# EAGLE board Safmet (EAGLE 9.6.2)
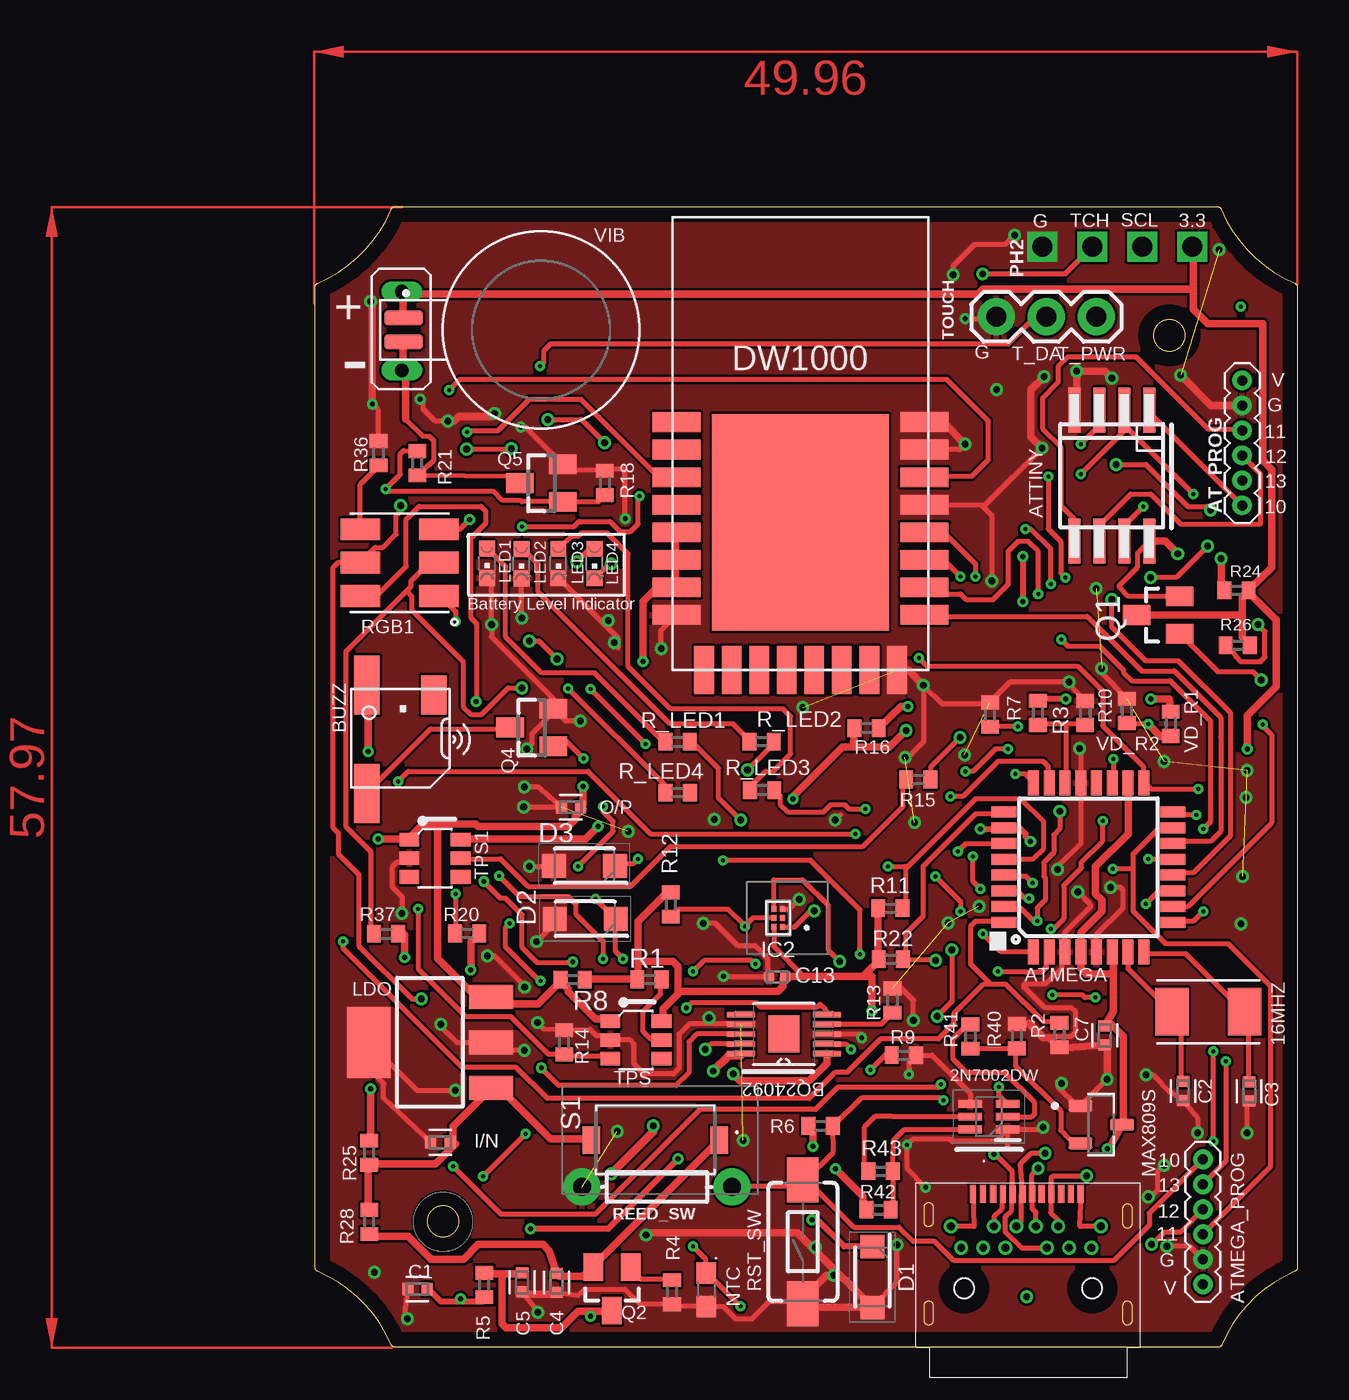
[diagram p0: board, top side]
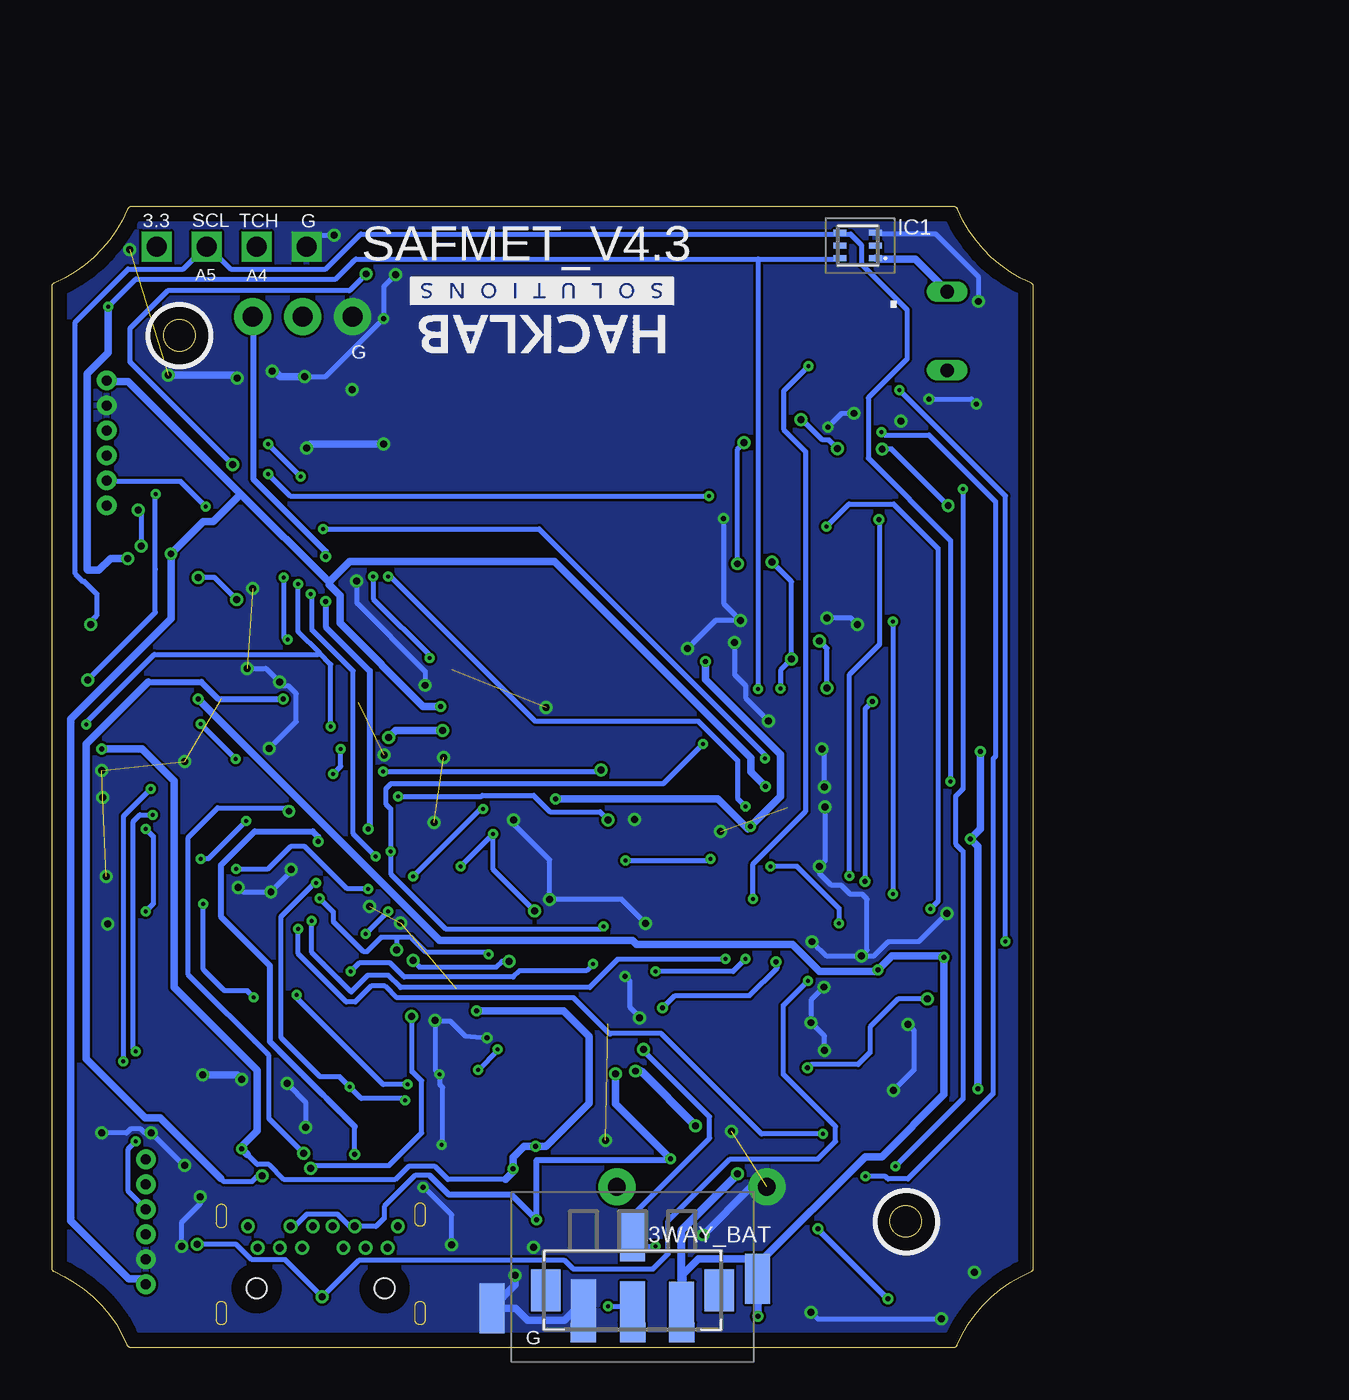
[diagram p1: board, bottom side, seen from below]

Size 49.9 x 57.95 mm. Coordinates in mm from the lower left corner, seen from the top.
Outline: 0,53.89 arc-67 0.12,54.07 arc44 3.85,57.8 arc-67 4.03,57.95 45.87,57.95 arc-67 46.05,57.8 arc44 49.78,54.07 arc-67 49.9,53.89 49.9,4.03 arc-67 49.78,3.85 arc44 46.07,0.12 arc-67 45.89,0 4.05,0 arc-67 3.87,0.12 arc44 0.12,3.85 arc-67 0,4.03 0,53.89
Outline: circle at 43.4,51.42 radius 0.8
Outline: circle at 6.5,6.4 radius 0.8
Copper layers (1*16): Top 0.035mm / dielectric 1.5mm / Bottom 0.035mm
Design rules "default *": minimum track width 10mil, minimum drill 8mil, track to track 5mil, track to pad 5mil, pad to pad 5mil, via to via 5mil, smd to smd 5mil, copper to edge 30mil, drill to drill 6mil, minimum pad ring 5mil, minimum via ring 6mil, stop-mask expansion 4mil, vias tented up to drill 20mil, thermal gap 0mil
Holes 1.02 mm at 32.98,3 39.48,3

## Footprints (pad centres in the part's own frame; a part is rotated, then mirrored left to right if it is on the bottom)
SOT65P210X110-6N = smd 1.2 x 0.4: 1 -0.95,0.65; 2 -0.95,0; 3 -0.95,-0.65; 4 0.95,-0.65; 5 0.95,0; 6 0.95,0.65
009155003541006 = smd 1.3 x 1: 1 -2.5,3.075; 2 0,3.075; 3 2.5,3.075 | smd 1.5 x 2.15: 4 -4.4,0.925; 5 4.4,0.925
CRYSTAL-TXC-7A = smd 1.7 x 2.4: P$1 1.85,0; P$2 -1.85,0
1X06_1.27MM = drill 0.508 pad 1: 1 0,0; 2 1.27,0; 3 2.54,0; 4 3.81,0; 5 5.08,0; 6 6.35,0
TQFP32-08 = smd 1.27 x 0.559: 1 -4.293,2.8; 2 -4.293,2; 3 -4.293,1.2; 4 -4.293,0.4; 5 -4.293,-0.4; 6 -4.293,-1.2; 7 -4.293,-2; 8 -4.293,-2.8; 17 4.293,-2.8; 18 4.293,-2; 19 4.293,-1.2; 20 4.293,-0.4; 21 4.293,0.4; 22 4.293,1.2; 23 4.293,2; 24 4.293,2.8 | smd 0.559 x 1.27: 9 -2.8,-4.293; 10 -2,-4.293; 11 -1.2,-4.293; 12 -0.4,-4.293; 13 0.4,-4.293; 14 1.2,-4.293; 15 2,-4.293; 16 2.8,-4.293; 25 2.8,4.293; 26 2,4.293; 27 1.2,4.293; 28 0.4,4.293; 29 -0.4,4.293; 30 -1.2,4.293; 31 -2,4.293; 32 -2.8,4.293
ATTINY85 = smd 0.6 x 2.286: 1 -1.905,-3.33; 2 -0.635,-3.33; 3 0.635,-3.33; 4 1.905,-3.33; 5 1.905,3.33; 6 0.635,3.33; 7 -0.635,3.33; 8 -1.905,3.33
SOP50P490X110-11N = smd 1.422 x 0.279: 1 -2.184,0.991; 2 -2.184,0.508; 3 -2.184,0; 4 -2.184,-0.508; 5 -2.184,-0.991; 6 2.184,-0.991; 7 2.184,-0.508; 8 2.184,0; 9 2.184,0.508; 10 2.184,0.991 | smd 1.575 x 1.88: 11 0,0
SMT-0540-S-R = smd 1.3 x 3: + 1.7,-2.7; - 1.7,2.8 | smd 1.3 x 2: M -1.7,-2.2
CAPC1005X60 = smd 0.56 x 0.629: 1 -0.485,0; 2 0.485,0
CAPC1005X55N = smd 0.54 x 0.6: 1 -0.43,0; 2 0.43,0
SODFL3618X108N = smd 1.2 x 1.22: 1 -1.55,0; 2 1.55,0
DWM1000 = smd 2.45 x 1: EXTON -2.8,12.6; GPIO7 -2.8,8.4; IRQ/GPIO8 9.8,9.8; RST -2.8,9.8; SPICLK 9.8,7; SPICSN 9.8,2.8; SPIMISO 9.8,5.6; SPIMOSI 9.8,4.2; VDD3V3 -2.8,4.2; VDD3V3.2 -2.8,5.6; VDDAON -2.8,7; VSS -2.8,2.8; VSS.2 9.8,12.6; VSS.3 9.8,11.2; VSS.4 9.8,8.4; WAKEUP -2.8,11.2 | smd 9 x 11: GND 3.5,7.5 | smd 1 x 2.45: GPIO0 7,0; GPIO1 5.6,0; GPIO2 4.2,0; GPIO3 2.8,0; GPIO4 1.4,0; GPIO5 0,0; GPIO6 -1.4,0; VSS.5 8.4,0
LTR303ALS01 = smd 0.3 x 0.65: 1 -0.65,-0.9; 2 0,-0.9; 3 0.65,-0.9; 4 0.65,0.9; 5 0,0.9; 6 -0.65,0.9
MXC4005XC = smd 0.25 x 0.3: 1 -0.22,0.46; 2 -0.22,0; 3 -0.22,-0.46; 4 0.22,-0.46; 5 0.22,0; 6 0.22,0.46
SOT223 = smd 1.219 x 2.235: 1 -2.311,-3.099; 2 0,-3.099; 3 2.311,-3.099 | smd 3.6 x 2.2: 4 0,3.099
CHIPLED_0603 = smd 0.8 x 0.8: A 0,-0.75; C 0,0.75
SOT95P237X111-3N = smd 1.23 x 0.6: 1 -1.06,0.95; 2 -1.06,-0.95; 3 1.06,0
THERM_NCP18WF104J03RB = smd 1.1 x 1: 1 -0.85,0; 2 0.85,0
SMD1,27-2,54 = smd 1.27 x 2.54: 1 0,0
PH010-1-4 = drill 1.016 square: 1 0,0; 2 2.54,0; 3 5.08,0; 4 7.62,0
SUPER-SOT3 = smd 1 x 1.4: 1 -0.95,-1.1; 2 0.95,-1.1; 3 0,1.1
SOT23 = smd 1 x 1.4: 1 -0.95,-1.1; 2 0.95,-1.1; 3 0,1.1
R0402 = smd 0.7 x 0.9: 1 -0.61,0; 2 0.622,0
AXIAL-0.3 = drill 0.9 pad 1.88: P$1 -3.81,0; P$2 3.81,0
RGBLED5050 = smd 2 x 1.1: 1 -2,1.7; 2 -2,0; 3 -2,-1.7; 4 2,-1.7; 5 2,0; 6 2,1.7
TACTILE_SWITCH_SMD_6.0X3.5MM = smd 2.3 x 1.6: 1 -3.15,0; 2 3.15,0
PTS636SK50JSMTRLFS = smd 0.9 x 1.4: 1 -3.25,0; 2 3.25,0
1X03 = drill 1.016 pad 1.88: 1 0,0; 2 2.54,0; 3 5.08,0
SOT-23-6 = smd 0.69 x 1: CT 0.95,1.3; GND 0,-1.3; ON 0.95,-1.3; QOD 0,1.3; VIN -0.95,-1.3; VOUT -0.95,1.3
PHLS005-1-2 = drill 0.7 pad 1.016 long: 1 -2,0; 2 2,0
CUI_USB-31C-F-24X7F = smd 0.32 x 0.91: A1 -3.25,4.48; A2 -2.742,4.479; A3 -2.23,4.48; A4 -1.73,4.48; A5 -1.23,4.48; A6 -0.73,4.48; A7 -0.248,4.489; A8 0.24,4.483; A9 0.735,4.474; A10 1.235,4.477; A11 1.728,4.483; A12 2.222,4.486 | drill 0.4 pad 0.7: B1 3.25,2.82; B2 2.76,1.73; B3 1.63,1.73; B4 1.08,2.82; B5 0.5,1.73; B6 -0.05,2.82; B7 -1.05,2.82; B8 -1.6,1.73; B9 -2.18,2.82; B10 -2.73,1.73; B11 -3.85,1.73; B12 -4.37,2.82
XDCR_C0720B001F = smd 0.76 x 1.94: 1 -0.6,-5.02; 2 0.6,-5.02

## Placement (x,y rotation side)
2N7002DW  2N7002DW  [SOT65P210X110-6N]  34.23,11.72 180 top
3WAY_BAT  009155003541006  [009155003541006]  20.38,3.82 180 bottom
16MHZ  16MHz  [CRYSTAL-TXC-7A]  45.38,17.05 180 top
AT_PROG  [1X06_1.27MM]  47.1,42.78 90 top
ATMEGA  ATMEGA328P_TQFP  [TQFP32-08]  39.3,24.39 90 top
ATMEGA_PROG  [1X06_1.27MM]  45.11,9.55 270 top
ATTINY  ATTINY85SU  [ATTINY85]  40.48,44.29 180 top
BQ24092  BQ24092DGQR  [SOP50P490X110-11N]  23.81,15.91 180 top
BUZZ  SMT-0540-S-R  [SMT-0540-S-R]  4.33,30.94 180 top
C1  1uF  [CAPC1005X60]  5.2,2.96 180 top
C2  18pF  [CAPC1005X60]  44.1,13.02 270 top
C3  18pF  [CAPC1005X60]  47.46,13 270 top
C4  4.7uF  [CAPC1005X60]  12.26,3.28 90 top
C5  1uF  [CAPC1005X60]  10.52,3.3 270 top
C7  1uF  [CAPC1005X60]  40.12,15.85 270 top
C13  1~4.7uF  [CAPC1005X55N]  23.48,18.83 180 top
D1  SMF5.0CA  [SODFL3618X108N]  28.31,3.57 270 top
D2  SMF5.0CA  [SODFL3618X108N]  13.68,24.46 180 top
D3  SMF5.0CA  [SODFL3618X108N]  13.72,21.77 180 top
DECAWAVE  DWM1000  [DWM1000]  21.16,34.41 0 top
I/N  1uF  [CAPC1005X60]  6.36,10.42 180 top
IC1  LTR-308ALS-01  [LTR303ALS01]  8.93,55.99 90 bottom
IC2  MXC4005XC  [MXC4005XC]  23.53,21.82 180 top
LDO  TC1264  [SOT223]  5.83,15.5 90 top
LED1  [CHIPLED_0603]  8.73,39.84 180 top
LED2  [CHIPLED_0603]  10.49,39.81 180 top
LED3  [CHIPLED_0603]  12.36,39.83 180 top
LED4  [CHIPLED_0603]  14.19,39.83 180 top
MAX809S  MAX809SN293D3T1G  [SOT95P237X111-3N]  39.94,11.32 0 top
NTC  NCP18WF104J03RB  [THERM_NCP18WF104J03RB]  19.87,2.92 270 top
O/P  1uF 10V  [CAPC1005X60]  13,27.44 180 top
PAD1  [SMD1,27-2,54]  17.89,2.05 180 bottom
PAD2  [SMD1,27-2,54]  22.88,2.18 180 bottom
PAD3  [SMD1,27-2,54]  20.38,2.07 180 bottom
PAD4  [SMD1,27-2,54]  14.03,3.49 180 bottom
PAD5  [SMD1,27-2,54]  27.52,1.99 180 bottom
PAD6  [SMD1,27-2,54]  20.37,5.65 180 bottom
PH2  PH1X4-10  [PH010-1-4]  36.95,55.93 0 top
Q1  FDN360P  [SUPER-SOT3]  42.83,37.21 90 top
Q2  FDN360P  [SUPER-SOT3]  15.08,2.98 180 top
Q4  SI2302  [SOT23]  11,31.49 90 top
Q5  SI2302  [SOT23]  11.49,43.91 90 top
R1  1k  [R0402]  16.99,18.7 180 top
R2  10K  [R0402]  37.81,15.87 270 top
R3  1K  [R0402]  36.73,32.23 90 top
R4  10k  [R0402]  18.13,2.81 270 top
R5  0  [R0402]  8.6,3.18 270 top
R6  10K  [R0402]  25.68,11.25 0 top
R7  10K  [R0402]  34.29,32.14 90 top
R8  0 ohms  [R0402]  13.09,18.68 180 top
R9  540  [R0402]  29.91,14.84 0 top
R10  2K  [R0402]  39.13,32.24 270 top
R11  2.7K  [R0402]  29.24,22.31 180 top
R12  2.7K  [R0402]  18.07,22.49 90 top
R13  4.7k  [R0402]  29.33,17.62 270 top
R14  1k  [R0402]  12.65,15.51 270 top
R15  1k  [R0402]  30.64,28.85 0 top
R16  0 ohms  [R0402]  28.01,31.46 0 top
R18  10K  [R0402]  14.72,43.93 270 top
R20  1.5k  [R0402]  7.72,21.03 0 top
R21  0  [R0402]  5.19,44.92 90 top
R22  2.7K  [R0402]  29.26,19.72 180 top
R24  10K  [R0402]  46.8,38.47 0 top
R25  0ohm  [R0402]  2.75,9.88 90 top
R26  10K  [R0402]  46.88,35.67 0 top
R28  0  [R0402]  2.75,6.36 90 top
R36  220  [R0402]  3.22,45.44 270 top
R37  1.5K  [R0402]  3.6,21.01 0 top
R40  100k(1%)  [R0402]  35.65,15.82 270 top
R41  1k(1%)  [R0402]  33.3,15.8 270 top
R42  10K(1%)  [R0402]  28.62,6.99 0 top
R43  1k(1%)  [R0402]  28.74,8.95 180 top
R_LED1  220  [R0402]  18.41,30.76 0 top
R_LED2  220  [R0402]  22.68,30.77 0 top
R_LED3  220  [R0402]  22.7,28.31 0 top
R_LED4  220  [R0402]  18.42,28.18 0 top
REED_SW  0  [AXIAL-0.3]  17.37,8.15 0 top
RGB1  RGBLED5050  [RGBLED5050]  4.29,39.87 180 top
RST_SW  MOMENTARY-SWITCH-SPST-SMD-6.0X3.5MM  [TACTILE_SWITCH_SMD_6.0X3.5MM]  24.78,5.36 90 top
S1  PTS636_SK50J_SMTR_LFS  [PTS636SK50JSMTRLFS]  17.28,10.53 180 top
TOUCH  455-1750-1-ND  [1X03]  34.61,52.37 0 top
TPS  TPS22918  [SOT-23-6]  16.3,15.61 270 top
TPS1  TPS22918  [SOT-23-6]  6.09,24.85 270 top
U$1  2MM  [PHLS005-1-2]  4.4,51.65 90 top
U$2  3A_5V  [CUI_USB-31C-F-24X7F]  36.68,3.32 0 top
VD_R1  12K  [R0402]  43.47,31.69 270 top
VD_R2  3.9K  [R0402]  41.25,32.33 90 top
VIB  C0720B001F  [XDCR_C0720B001F]  9.51,51.7 270 top

## Library data of the parts
2N7002DW = 2N7002DW; DESCRIPTION: 2N7002DW, Dual N-channel MOSFET Transistor, 0.115A 60V, 6-Pin SC-70; HEIGHT: 1.1mm; MANUFACTURER_NAME: ON Semiconductor; MANUFACTURER_PART_NUMBER: 2N7002DW; MOUSER_PART_NUMBER: 512-2N7002DW; MOUSER_PRICE-STOCK: https://www.mouser.co.uk/ProductDetail/ON-Semiconductor/2N7002DW?qs=4aVxpR%2FL9VItb3yGt5CeZg%3D%3D
3WAY_BAT = 009155003541006; DESCRIPTION: Battery Contacts 3 Way .4um Gold RT Angle 2.5mm; HEIGHT: 4mm; MANUFACTURER_NAME: AVX; MANUFACTURER_PART_NUMBER: 009155003541006; MOUSER_PART_NUMBER: 581-009155003541006; MOUSER_PRICE-STOCK: https://www.mouser.com/Search/Refine.aspx?Keyword=581-009155003541006
16MHZ = SparkFun-FreqCtrl
AT_PROG ATMEGA_PROG = SparkFun-Connectors
ATMEGA = SparkFun-DigitalIC; PROD_ID: IC-09069
ATTINY = attiny85
BQ24092 = BQ24092DGQR; AVAILABILITY: Unavailable; DESCRIPTION: 1A, Single-Input, Single-Cell Li-Ion Battery Charger with Operation Over JEITA and 10kO NTC 10-MSOP-PowerPAD -40 to 150; MF: Texas Instruments; MP: BQ24092DGQR; PACKAGE: MSOP-10 Texas Instruments; PRICE: None
BUZZ LED1-LED4 RGB1 = adafruit
C1-C5 C7 I/N O/P = Capacitor; CATEGORY: Capacitor
C13 = C0402C201GAGACTU; AVAILABILITY: Unavailable; DESCRIPTION: Multilayer Ceramic Capacitors MLCC - SMD/SMT 250V 200pF C0G 0402 0.02; MF: KEMET; MP: C0402C201GAGACTU; PACKAGE: 0402 KEMET; PRICE: None
D1-D3 = SMF5.0CA; DESCRIPTION: ESD Suppressors / TVS Diodes "TVS SMF 5.0V BI, 7'' TR" Surface Mount 200W > SMF Series; HEIGHT: 1.08mm; MANUFACTURER_NAME: LITTELFUSE; MANUFACTURER_PART_NUMBER: SMF5.0CA; MOUSER_PART_NUMBER: 576-SMF5.0CA; MOUSER_PRICE-STOCK: https://www.mouser.co.uk/ProductDetail/Littelfuse/SMF50CA?qs=d0WKAl%252BL4KbRT8gYdmqI%252Bg%3D%3D
DECAWAVE = DWM1000
IC1 = LTR-308ALS-01; DESCRIPTION: Ambient Light Sensors Ambient Light Photo Sensor; HEIGHT: 0mm; MANUFACTURER_NAME: Lite-On; MANUFACTURER_PART_NUMBER: LTR-308ALS-01; MOUSER_PART_NUMBER: N/A; MOUSER_PRICE-STOCK: https://www.mouser.com/Search/Refine.aspx?Keyword=N%2FA
IC2 = MXC4005XC_ACC; DESCRIPTION: Accelerometers Monolithic and Wafer Level Packaged Three-Axis Accelerometer; HEIGHT: 0.885mm; MANUFACTURER_NAME: MEMSIC; MANUFACTURER_PART_NUMBER: MXC4005XC; MOUSER_PART_NUMBER: 438-MXC4005XC; MOUSER_PRICE-STOCK: https://www.mouser.co.uk/ProductDetail/MEMSIC/MXC4005XC?qs=RcG8xmE7yp3iyYgWLmAtUw%3D%3D
LDO = tc1264
MAX809S = MAX809SN293D3T1G; AVAILABILITY: Warning; DESCRIPTION: Supervisor Push-Pull, Totem Pole 1 Channel SOT-23-3 (TO-236); MF: ON Semiconductor; MP: MAX809SN293D3T1G; PACKAGE: SOT-23-3 ON Semiconductor; PRICE: None; PURCHASE-URL: https://pricing.snapeda.com/search/part/MAX809SN293D3T1G/?ref=eda
NTC = NCP18WF104J03RB; AVAILABILITY: Unavailable; DESCRIPTION: NTC Thermistor 100k 0603 _1608 Metric_; MF: Murata Electronics; MP: NCP18WF104J03RB; PACKAGE: 0603 Murata Electronics; PRICE: None
PAD1-PAD6 = wirepad
PH2 = pel_hdr
Q1 Q2 = FDN360P; ARROW_ELECTRONICS-PURCHASE-URL: https://snapeda.com/shop?store=Arrow+Electronics&id=2105995; AVAILABILITY: Good; DESCRIPTION: P-Channel 30V 2A (Ta) 500mW (Ta) Surface Mount SuperSOT-3; DIGIKEY-PURCHASE-URL: https://snapeda.com/shop?store=DigiKey&id=2105995; MF: ON Semiconductor; MOUSER-PURCHASE-URL: https://snapeda.com/shop?store=Mouser&id=2105995; MP: FDN360P; PACKAGE: SC-59 ON Semiconductor; PRICE: None
Q4 Q5 = SI2302; AVAILABILITY: Bad; DESCRIPTION: N-Channel 20V 2.6A (Ta) 710mW (Ta) Surface Mount SOT-23-3 (TO-236); MF: Vishay Siliconix; MP: SI2302; PACKAGE: SOT-23-3 Vishay Siliconix; PRICE: None
R1-R16 R18 R20-R22 R24-R26 R28 R36 R37 R40-R43 R_LED1-R_LED4 VD_R1 VD_R2 = resistor2
REED_SW = Hacklab_Resistors; PART_NO: 0_OHM_AXIAL-0.3_1/4W_5%; PINS: 2; SKU: RES_0_OHM_AXIAL-0.3 _1/4W_5%; TYPE: TH
RST_SW = SparkFun-Switches; PROD_ID: SWCH-00815; SF_SKU: COM-08229
S1 = 6x3.5mm_5mm_H switch; DESCRIPTION: Tactile Switches Tact 50mA 12VDC, 6.0x3.5, 5.0mm H, 250gf, J leads, No ground pin, Red Actuator; HEIGHT: 5mm; MANUFACTURER_NAME: C & K COMPONENTS; MANUFACTURER_PART_NUMBER: PTS636 SK50J SMTR LFS; MOUSER_PART_NUMBER: 611-PTS636SK50JSMTRL; MOUSER_PRICE-STOCK: https://www.mouser.co.uk/ProductDetail/CK/PTS636-SK50J-SMTR-LFS?qs=vLWxofP3U2y%2F9cEgatLecw%3D%3D
TOUCH = Hacklab_Connectors; PROD_ID: XXX-00000
TPS TPS1 = tps22918
U$1 = 2MM
U$2 = Hack_USB-31C-F-24x7F; MFR: XIAMEN; PART_NO: USB-31C-F-24x7F; PINS: 24; SKU: USB-31C-F-24x7F; TYPE: SMD
VIB = C0720B001F; AVAILABILITY: Warning; DESCRIPTION: DC Motor Vibration, ERM 10000 RPM 3VDC; DIGIKEY-PURCHASE-URL: https://snapeda.com/shop?store=DigiKey&id=645169; MF: Jinlong Machinery; MP: C0720B001F; PACKAGE: Jinlong Machinery; PRICE: None

## Nets
3V3: ATMEGA.4 ATMEGA.6 ATMEGA.18 C7.1 C13.1 IC1.1 IC2.6 MAX809S.3 PH2.4 Q1.3 R1.2 R6.1 R8.1 R11.2 R12.2 R22.2 R24.2 R26.2 R42.1 TPS.VOUT U$1.2 VIB.1
ADC7: ATMEGA.22 R3.1 R10.2
BUZZ: ATMEGA.10 Q4.1 R7.1
BUZZ-: BUZZ.- Q4.3
CH_S: BQ24092.8 LED4.C RGB1.5
DW_3V3: DECAWAVE.VDD3V3 DECAWAVE.VDD3V3.2 DECAWAVE.VDDAON R15.2 R16.1 TPS1.VOUT
DW_RST: ATMEGA.13 DECAWAVE.RST
GND: 2N7002DW.1 2N7002DW.4 3WAY_BAT.3 AT_PROG.5 ATMEGA.3 ATMEGA.5 ATMEGA.21 ATMEGA_PROG.5 ATTINY.4 BQ24092.3 BQ24092.7 C1.2 C2.2 C3.2 C4.1 C5.2 C7.2 C13.2 D1.2 D2.2 D3.2 DECAWAVE.VSS DECAWAVE.VSS.2 DECAWAVE.VSS.3 DECAWAVE.VSS.4 DECAWAVE.VSS.5 I/N.2 IC1.3 IC2.3 LDO.2 LDO.4 LED1.C LED2.C LED3.C MAX809S.1 NTC.2 O/P.2 PAD2.1 PAD5.1 PH2.1 Q4.2 Q5.2 R2.2 R4.2 R7.2 R9.2 R10.1 R13.1 R14.1 R18.1 R36.1 R40.1 REED_SW.P$1 RST_SW.1 TOUCH.1 TPS1.GND TPS.GND VD_R2.2
GPIO: ATMEGA.9 ATTINY.3
IMP_RST: MAX809S.2 R40.2 R41.2
IND: ATMEGA.2 RGB1.3
INT: ATMEGA.32 DECAWAVE.IRQ/GPIO8 R2.1
INT1: ATMEGA.25 IC2.4 R22.1
LED_IND1: ATMEGA.23 R_LED1.2
LED_IND2: ATMEGA.24 R_LED2.2
LED_IND3: ATMEGA.1 R_LED3.2
LS_EN: ATTINY.2 Q1.1 R14.2 TPS.ON
MISO: ATMEGA.16 ATMEGA_PROG.3 DECAWAVE.SPIMISO
MOSI: ATMEGA.15 ATMEGA_PROG.4 DECAWAVE.SPIMOSI
N$1: R_LED4.2
N$2: 16MHZ.P$2 ATMEGA.8 C3.1
N$3: 16MHZ.P$1 ATMEGA.7 C2.1
N$4: 2N7002DW.2 R41.1
N$5: R1.1 TPS.QOD
N$6: Q2.1 R4.1
N$7: LED1.A R_LED1.1
N$8: LED2.A R_LED2.1
N$9: I/N.1 LDO.1 R25.1 R28.2 S1.2
N$10: BQ24092.2 R9.1
N$11: BQ24092.4 R13.2
N$12: ATMEGA.19 VD_R1.2 VD_R2.1
N$13: R36.2 RGB1.4
N$14: R20.1 RGB1.1
N$15: LED4.A R37.1 R_LED4.1 RGB1.2
N$16: R15.1 TPS1.QOD
N$17: LED3.A R_LED3.1
N$18: U$2.A1 U$2.B12
N$19: U$2.A12 U$2.B1
N$23: 2N7002DW.6 R42.2 R43.1
N$24: 2N7002DW.5 R43.2
PB0: AT_PROG.4 ATTINY.5
PB1: AT_PROG.3 ATTINY.6
PB2: AT_PROG.2 ATTINY.7
PB5: AT_PROG.1 ATTINY.1
PG: BQ24092.5 RGB1.6
PWR: BQ24092.1 C1.1 D1.1 R3.2 R5.2 U$2.A4 U$2.A9 U$2.B4 U$2.B9
RST: 2N7002DW.3 ATMEGA.29 ATMEGA_PROG.1 R6.2 REED_SW.P$2 RST_SW.2
RX: ATMEGA.30 D2.1 U$2.A7 U$2.B6
SCK: ATMEGA.17 ATMEGA_PROG.2 DECAWAVE.SPICLK
SCL: ATMEGA.28 IC1.4 IC2.1 PH2.3 R11.1 R26.1
SDA: ATMEGA.27 IC1.6 IC2.5 R12.1 R24.1
SS: ATMEGA.14 DECAWAVE.SPICSN
T_PWR: ATMEGA.26 TOUCH.3 U$2.A5 U$2.B5
TH: 3WAY_BAT.2 BQ24092.9 NTC.1 PAD3.1 PAD6.1
TOUCH: ATMEGA.12 PH2.2
TX: ATMEGA.31 D3.1 TOUCH.2 U$2.A6 U$2.B7
VBAT+: 3WAY_BAT.1 BQ24092.10 C5.1 PAD1.1 PAD4.1 Q2.3 R5.1 R20.2 R37.2 VD_R1.1
VCC: AT_PROG.6 ATMEGA_PROG.6 ATTINY.8 BUZZ.+ LDO.3 O/P.1 Q1.2 R8.2 R16.2 R25.2 TPS1.VIN TPS.VIN
VIB: ATMEGA.11 Q5.1 R18.2 R21.2
VIB-: Q5.3 R21.1 U$1.1 VIB.2
VLDO: C4.2 Q2.2 R28.1 S1.1

## Tracks (layer width: path | path; a pad name or v marks a point on that pad's centre or on a via)
3V3  (via drill 0.25)
  Top 0.254: IC2.6 23.31,20.36 24.82,18.85
  Top 0.381: 40.55,18.97 40.55,17.08 C7.1 40.29,16.56 41.05,15.8 41.05,11.43 MAX809S.3 40.33,10.08 v40.24,10.08 | 40.55,18.97 40.55,19.99 ATMEGA.6 | 40.55,18.97 39.17,18.97 38.9,19.25 38.9,19.99 ATMEGA.4 38.9,21.08 39.96,22.15 39.96,22.73 39.65,23.05 39.65,24.42 41.31,26.08 41.31,28.62 ATMEGA.18 | R8.1 13.75,18.72 16.29,18.72 R1.2 16.42,18.85 16.42,19.61 | 16.42,19.61 16.42,21.64 17.81,23.04 18.07,23.04 R12.2 | 18.45,18.08 18.45,19.35 18.19,19.61 16.42,19.61 | 18.45,18.08 18.45,17.96 17.69,17.19 17.69,16.69 TPS.VOUT | v26.45,9.07 27.85,7.67 27.85,7.03 R42.1 | v25.31,10.21 25.31,10.97 25.05,11.23 R6.1 | 27.85,18.85 28.3,18.85 v28.3,17.09 | 27.85,18.85 24.82,18.85 23.91,18.85 C13.1 23.78,18.72 23.78,18.34 23.53,18.08 18.45,18.08 | 27.85,18.85 28.61,19.61 R22.2 28.61,19.86 28.61,22.27 R11.2 | VIB.1 4.48,52.37 4.48,53.64 U$1.2 4.61,53.52 33.69,53.52 33.94,53.77 44.61,53.77 | 44.61,53.77 44.61,52.75 45.35,52.02 48.14,52.02 48.14,45.08 48.61,44.61 48.61,39.62 R24.2 47.4,38.41 | 44.61,53.77 44.61,55.93 PH2.4 | R26.2 47.12,36.08 47.12,37.13 | 47.4,38.41 47.12,38.13 47.12,37.13 | Q1.3 47.04,37.21 47.12,37.13 | v47.35,30.4 47.35,32.09 48.84,33.58 48.84,36.97 47.4,38.41
  Bottom 0.254: 26.83,8.53 29.76,8.53 30.42,9.19 31.76,9.19 32.45,8.51 38.08,8.51 38.86,9.29 39.45,9.29 39.96,9.8
  Bottom 0.381: v28.3,17.09 23.88,17.09 22.59,15.8 22.59,12.39 24.77,10.21 v25.31,10.21 25.89,10.21 26.45,9.65 v26.45,9.07 26.45,8.91 26.83,8.53 | IC1.1 7.91,55.29 6,55.29 4.48,53.77 U$1.2 | v47.35,30.4 45.3,30.4 43.67,28.78 43.67,18.29 39.45,14.07 39.45,11 40.24,10.21 v40.24,10.08 39.96,9.8
ADC7
  Top 0.254: 38.13,31.67 39.02,31.67 R10.2 | 38.13,31.67 36.74,31.67 R3.1 | 38.13,31.67 38.13,28.75 ATMEGA.22
BUZZ  (via drill 0.2)
  Top 0.254: v35.72,31.55 34.32,31.55 R7.1 | ATMEGA.10 43.59,22.4 44.36,22.4 48.6,26.64 48.6,31.11 48.14,31.57 v48.14,31.65 | v13.65,29.92 12.73,30.83 12.41,30.83 Q4.1 | v36.1,41.58 36.36,41.58 37.37,40.56 v37.37,38.78
  Bottom 0.254: v48.14,31.65 48.14,31.75 44.69,35.2 36.36,35.2 36.29,35.27 | v13.65,29.92 13.65,30.1 25.13,41.58 v36.1,41.58 | v37.37,38.78 37.37,36.35 36.29,35.27 | v35.72,31.55 35.72,34.7 36.29,35.27
BUZZ-
  Top 0.254: Q4.3 9.81,31.42 5.88,31.42 2.7,28.24 BUZZ.-
CH_S  (via drill 0.25, 0.35)
  Top 0.254: v5.39,17.7 4.92,17.7 2.22,20.4 2.22,24.03 1.18,25.07 1.18,26.13 0.91,26.4 0.91,39.61 1.17,39.87 RGB1.5 3.06,40.64 3.45,40.64 4.12,41.32 4.12,42.27 4.34,42.49 v4.34,42.78 | BQ24092.8 19.38,15.91 18.99,15.52 18.99,13.95 18.35,13.31 12.38,13.31 v11.49,14.2 | LED4.C 14.93,39.81 v15.05,39.81 | v7.69,45.65 9.94,45.65 v9.96,45.67 | v11.82,47.14 13.54,47.14 v14.71,45.96
  Bottom 0.254: v5.39,17.7 6.89,17.7 8.31,16.28 8.31,14.98 8.92,14.38 11.31,14.38 v11.49,14.2 | v15.05,39.81 15.05,45.63 v14.71,45.96 | v4.34,42.78 7.21,45.65 v7.69,45.65 | v9.96,45.67 10.4,46.1 10.72,46.1 11.76,47.14 v11.82,47.14
DW_3V3  (via drill 0.25, 0.35)
  Top 0.254: R15.2 31.29,29.5 v32.77,30.99
  Top 0.381: v14.38,26.47 13.75,25.83 7.4,25.83 TPS1.VOUT | v16.67,34.85 16.67,37.9 17.3,38.53 18.32,38.53 DECAWAVE.VDD3V3 18.32,38.78 18.32,39.93 DECAWAVE.VDD3V3.2 18.32,40.18 18.32,41.32 DECAWAVE.VDDAON | v24.29,27.86 24.29,27.99 26.8,30.5 27.24,30.5 | 27.24,30.5 29.19,30.5 v30.03,31.34 | R16.1 27.36,30.62 27.24,30.5
  Bottom 0.381: v16.67,34.85 16.67,33.93 12.86,30.12 12.86,27.99 v14.38,26.47 14.51,26.34 16.04,27.86 v24.29,27.86 | v30.03,31.34 32.42,31.34 v32.77,30.99
DW_RST  (via drill 0.2)
  Top 0.254: v42.32,24.81 43.47,24.81 ATMEGA.13 | v40.01,26.74 40.01,25.73 38.93,24.65 38.93,24.36 38.03,23.46 38.03,21.77 37.52,21.26 v37.37,21.26 | v8.54,8.69 v10.7,10.84 | v7.73,46.51 7.78,46.56 9.28,46.56 10.88,48.16 13.52,48.16 17.43,44.25 18.32,44.25 DECAWAVE.RST
  Bottom 0.254: v42.32,24.81 41.94,24.81 v40.01,26.74 | v37.37,21.26 37.37,19.99 34.93,17.55 34.47,17.55 33.66,18.36 32.97,18.36 32.37,17.77 23.39,17.77 21.55,15.92 21.52,15.92 21.48,15.96 18.94,15.96 13.83,10.84 v10.7,10.84 | v8.54,8.69 7.53,8.69 7.4,8.56 6.38,8.56 2.06,12.88 2.06,29.89 1.94,30.02 1.94,42.98 5.32,46.35 7.58,46.35 v7.73,46.51
GND  (via drill 0.2, 0.25, 0.35)  (14 unrouted)
  Top 0.254: 2N7002DW.1 35.18,10.12 | LED1.C 8.95,38.87 8.95,36.74 v8.96,36.73 8.96,36.09 12.1,32.95 Q4.2 12.12,32.43 | LED3.C 14.79,36.65 | v17.58,35.51 17.58,36.44 DECAWAVE.VSS | 14.79,36.65 15.4,36.04 15.4,35.53 15.2,35.73 v15.2,35.82 | v13.47,31.82 12.72,31.82 12.12,32.43 | v33.03,45.9 32.74,45.61 DECAWAVE.VSS.3 | DECAWAVE.VSS.4 33.84,42.81 | 33.84,42.81 34.06,42.81 v36.94,45.69 | v44.84,10.9 44.84,11.63 C2.2 43.53,12.94 43.49,12.94 42.59,13.84 v42.22,13.84 | v47.35,10.9 47.35,12.25 C3.2 | v11.31,1.79 11.31,1.86 C5.2 | v4.68,1.45 4.55,1.58 C1.2 | C4.1 13.36,2.63 13.69,2.96 15.74,2.96 16.5,2.2 18.09,2.2 R4.2 18.21,2.07 NTC.2 20.73,2.07 21.36,1.45 22.21,1.45 23.1,2.34 24.65,2.34 RST_SW.1 | I/N.2 3.49,12.64 3.49,13.4 2.73,14.16 LDO.4 5.17,13.05 v7.12,13.05 | v35.54,56.51 35.06,56.03 33.51,56.03 32.42,54.94 v32.42,54.51 | v6.38,16.41 6.38,16.29 7.17,15.5 LDO.2 9.34,15.08 v10.62,15.08 | VD_R2.2 39.96,34.27 v39.96,34.49 | v38.84,30.43 38.9,30.37 ATMEGA.21 38.9,25.58 37.82,24.5 37.82,24.28 v37.73,24.28 | TPS1.GND 4.57,24.63 4.13,24.63 3.91,24.4 3.91,23.4 4.43,22.88 4.43,21.92 4.41,21.94 v4.41,22.04 | v30.41,16.62 30.41,17.63 29.77,18.27 R13.1 | 25.42,4.91 v25.42,5.08 | v40.24,13.61 v40.23,13.61 MAX809S.1 38.69,12.27 37.74,13.22 v37.93,13.41 | ATMEGA_PROG.5 44.44,5.14 v43.28,5.14 | BQ24092.3 27.77,15.91 v27.77,15.72 | v10.6,27.46 10.61,27.44 O/P.2 11.31,28.47 v10.62,28.47 | v10.88,24.43 12.11,24.43 D2.2 | v10.76,30.41 11.02,30.68 11.02,31.2 12.12,32.29 12.12,32.43 | R40.1 36.37,16.47 37.04,15.79 38.42,15.79 38.64,16.01 38.64,17.03 38.42,17.25 37.08,17.25 36.03,18.31 36.03,18.46 37.11,18.46 37.96,19.31 37.96,20.1 ATMEGA.3 38.1,21.09 39.39,22.38 39.39,22.5 39.08,22.81 39.08,22.82 v38.76,23.14
  Top 0.254: D1.2 29.57,3.29 v29.57,5.21 | BQ24092.7 20.34,16.42 | 20.34,16.42 19,16.42 18.48,15.91 18.48,14.16 18.21,13.89 16.72,13.89 16.21,14.4 16.21,15.42 16.02,15.61 TPS.GND 14.78,15.84 14.3,15.84 13.98,16.16 R14.1 11.64,16.16 v11.31,16.49 v11.31,16.5 | 33.84,42.81 34.4,42.26 v34.4,38.95 | IC2.3 24.11,22.28 v24.6,22.76 | v26.42,26.79 26.69,27.06 | v19.72,21.54 20.34,21.54 21.48,20.39 22.37,20.39 23.02,19.74 23.02,18.86 C13.2 20.87,18.83 20.83,18.79 v20.76,18.86 | v20.02,16.74 20.34,16.42 | v8.75,19.89 9.11,19.89 10.65,18.35 v10.65,18.3 | ATMEGA.5 39.7,20.97 41.05,22.33 41.05,23.21 40.9,23.37 v40.42,23.37 | v10.5,37.06 10.49,37.08 LED2.C | 2N7002DW.1 36.88,11.07 v36.99,11.18 | 2N7002DW.4 33.28,12.9 31.34,14.84 R9.2 30.18,14.47 v30.18,13.87 | 2N7002DW.1 34.58,10.46 32.36,10.46 32.26,10.56 30.36,10.56 30.08,10.29 | 30.08,10.29 v30.07,10.29 | R18.1 14.94,44.58 | v33.03,52.27 34.51,52.27 TOUCH.1 | D3.2 12.17,21.52 v11.26,20.61 | v5.33,48.18 5.49,48.02 5.49,47.67 6.1,47.06 v6.74,47.06 | R10.1 38.31,33.7 v38.31,33.8 35.31,33.8 34.32,32.82 R7.2 34.19,32.69 31.87,32.69 v30.92,33.64 30.92,30.75 29.98,29.82 v29.98,29.97 | R36.1 3.22,47.61 v2.9,47.93 | v15.76,42.11 15.76,44.63 14.77,44.63 R18.1 | R18.1 12.87,44.58 Q5.2 10.69,46.76 v10.45,46.76 | v31.02,8.13 30.08,9.07 30.08,9.55 30.08,10.29 | v43.14,9.24 42.8,8.91 42.8,7.98 42.48,7.65 v42.34,7.65 | v14.89,36.93 14.89,36.75 14.79,36.65
  Top 0.381: v6.74,47.06 7.07,47.06 7.3,47.29 8.96,47.29 v9.12,47.45 | v2.9,47.93 2.9,53.29 2.81,53.19 v2.81,53.15 | DECAWAVE.VSS.2 31.91,47.01 v33.03,45.9 | v36.94,45.69 36.38,46.25 36.38,48.67 v37.04,49.33 | ATTINY.4 38.69,47.74 v38.69,49.61 40.12,49.61 v40.47,49.25 | AT_PROG.5 45.52,47.86 v43.98,49.4 | v40.24,13.61 40.24,15.08 C7.2 37.84,15.2 R2.2 37.31,15.73 37.01,15.73 36.28,16.47 R40.1 | RST_SW.1 24.96,2.02 D1.2 25.42,4.91 24.51,5.83 18.92,5.83 18.91,5.82 16.75,5.82 16.75,5.76 v16.81,5.7 | C5.2 10.55,2.68 12.21,2.68 C4.1 | v26.35,3.66 25.98,3.66 24.65,2.34 | DECAWAVE.VSS.5 30.14,34.41 v30.92,33.64
  Bottom 0.254: v17.58,35.51 16.16,36.93 v14.89,36.93 15.76,37.79 v15.76,42.11 | v15.2,35.82 15.2,34.19 14.64,33.62 14.64,32.99 v13.47,31.82 | v47.35,10.9 46.09,10.9 45.89,11.1 45.36,11.1 45.16,10.9 v44.84,10.9 43.19,9.24 v43.14,9.24 | v11.31,1.79 10.97,1.45 v4.68,1.45 | PH2.1 36.37,56.51 v35.54,56.51 | v7.12,13.05 6.08,14.1 6.08,16.1 v6.38,16.41 | v39.96,34.49 39,34.49 v38.31,33.8 38.11,33.6 37.86,33.6 37.47,33.22 37.47,31.8 v38.84,30.43 | v43.28,5.14 43.28,6.36 42.34,7.29 v42.34,7.65 | v10.6,27.46 10.6,24.72 v10.88,24.43 10.88,24.08 10.27,23.47 9.77,23.47 9.32,23.01 8.7,23.01 8.46,22.78 8.46,20.17 v8.75,19.89 | v10.62,28.47 10.62,30.28 v10.76,30.41 | v37.93,13.41 37.42,12.9 37.42,12.88 36.99,12.44 v36.99,11.18 | v40.42,23.37 40.19,23.14 v38.76,23.14 37.73,24.17 v37.73,24.28 | v34.4,38.95 34.4,37.83 30.92,34.35 v30.92,33.64 | v26.42,26.79 26.42,26.59 24.6,24.76 v24.6,22.76 20.93,22.76 v19.72,21.54 | v20.76,18.86 20.53,18.62 20.53,17.3 20.02,16.8 v20.02,16.74 | v11.26,20.61 10.53,19.89 v8.75,19.89 | v10.5,37.06 9.29,37.06 v8.96,36.73 | v27.77,15.72 28.9,15.83 29.65,16.58 30.38,16.58 v30.41,16.62 30.41,14.09 v30.18,13.87 30.18,13.35 30.03,13.2 30.03,10.34 v30.07,10.29 | v8.75,19.89 8.1,19.89 7.39,20.6 5.85,20.6 v4.41,22.04 | v10.62,15.08 10.62,15.82 v11.31,16.5 11.31,17.64 v10.65,18.3 | v32.42,54.51 33.03,53.9 v33.03,52.27 35.97,49.33 v37.04,49.33 | IC1.3 7.98,56.58 4.98,56.58 2.81,54.41 v2.81,53.15 | v5.33,48.18 3.16,48.18 v2.9,47.93 | v9.12,47.45 9.75,47.45 v10.45,46.76 | v31.02,8.13 30.97,8.13 29.57,6.73 v29.57,5.21
  Bottom 0.381: v33.03,45.9 36.74,45.9 v36.94,45.69 | v37.04,49.33 38.29,49.33 38.59,49.63 38.58,49.64 38.66,49.64 v38.69,49.61 | v43.98,49.4 40.62,49.4 v40.47,49.25 | v42.22,13.84 40.47,13.84 v40.24,13.61 | PAD2.1 22.94,2.18 | 22.94,2.18 23.04,2.18 23.84,1.38 25.71,1.38 26.32,1.99 PAD5.1 26.35,3.16 v26.35,3.66 | 3WAY_BAT.3 22.88,2.11 22.94,2.18 | v16.81,5.7 14.36,8.15 REED_SW.P$1
  other vias: 3,3.81 15.35,10.97 21.75,10.51 30.46,26.67 43.14,29.77 33,30.1 47.35,29.31 47.3,27.94 47.12,23.93 47.05,21.51 32.16,21.56 15.91,26.21 34.63,48.66 20.28,26.82 39.68,38.56 33.74,22.4 24.77,32.51 45.93,55.78
  pour Bottom: -1.03,59.03 -2.71,-2.54 -1.03,-2.54 51.98,-2.54 51.98,59.87
  pour Top: -2.3,61.36 -2.3,-3.81 53.25,-3.81 53.25,61.36
GPIO  (via drill 0.2)
  Top 0.254: v45.12,22.15 44.61,21.64 43.59,21.64 ATMEGA.9 | v45.12,26.34 45.5,26.72 45.5,31.8 43.44,33.86 41.51,33.86 41.08,34.29 41.08,34.41 39.87,35.61 38.26,35.61 v37.9,35.97 | v38.11,39.11 37.88,39.34 37.88,40.94 37.24,41.58 v37.24,44.25 | v38.9,45.9 39.78,46.79 39.78,47.55 ATTINY.3
  Bottom 0.254: v45.12,26.34 44.74,25.96 44.74,22.53 v45.12,22.15 | v38.11,39.11 38.11,36.04 38.03,35.97 v37.9,35.97 | v38.9,45.9 v37.24,44.25
IMP_RST
  Top 0.254: R41.2 33.31,15.16 35.59,15.16 R40.2 35.59,15.04 35.59,14.3 37.89,12 37.89,11.01 38.3,10.6 MAX809S.2
IND  (via drill 0.2, 0.25)
  Top 0.254: v22.39,19.48 22.21,19.66 19.77,19.66 v19.21,19.1 | v14.64,19.73 14.64,20.62 13.24,22.02 13.24,22.53 12.89,22.88 10.42,22.88 v9.36,23.95 | ATMEGA.2 37.24,19.99 37.16,19.9 37.16,19.31 36.93,19.08 36.06,19.08 36.04,19.1 v34.7,19.1 | RGB1.3 7.37,41.57 v7.86,42.06
  Bottom 0.254: v22.39,19.48 22.73,19.14 26.13,19.14 26.45,18.82 31.99,18.82 32.7,19.53 34.27,19.53 v34.7,19.1 | v19.21,19.1 15.27,19.1 v14.64,19.73 | v9.36,23.95 9.36,34.19 7.83,35.71 7.83,42.04 v7.86,42.06
INT  (via drill 0.2)
  Top 0.254: 34.32,18.46 35.09,18.46 36.99,16.56 37.75,16.56 R2.1 | 34.32,18.46 33.31,19.48 33.31,21.39 33.56,21.64 34.96,21.64 ATMEGA.32 | v6.82,48.64 7.35,49.17 32.11,49.17 34.2,47.09 34.2,45.08 33.36,44.25 31.02,44.25 DECAWAVE.IRQ/GPIO8 | v1.43,20.62 1.43,20.27 7.48,14.22 10.22,14.22 11.8,12.64 25.1,12.64 26.44,13.99 27.05,13.99 28.73,15.67 31.68,15.67 32.47,16.46 32.47,16.96 33.18,17.67 33.18,17.68 33.97,18.46 34.32,18.46
  Bottom 0.254: v6.82,48.64 1.43,43.25 v1.43,20.62
INT1  (via drill 0.35)
  Top 0.254: ATMEGA.25 34.96,27.1 33.56,27.1 30.89,24.43 30.89,21.89 30.01,21 30.01,19.73 R22.1 31.47,19.72 v31.53,19.66 | IC2.4 23.31,23.76 24.77,23.76 26.07,22.47 26.07,20.19 26.65,19.61 v26.65,19.62
  Bottom 0.254: v26.65,19.62 27.01,19.62 27.3,19.33 31.2,19.33 v31.53,19.66
LED_IND1  (via drill 0.2, 0.35)
  Top 0.254: v32.29,27.99 32.93,27.99 34.7,29.77 36.99,29.77 37.24,29.51 37.24,28.75 ATMEGA.23 | v21.62,26.79 20.51,27.91 20.51,29.41 19.15,30.76 R_LED1.2
  Bottom 0.254: v32.29,27.99 28.06,27.99 28.01,28.04 25.4,28.04 24.56,27.2 22.03,27.2 v21.62,26.79
LED_IND2  (via drill 0.2, 0.35)
  Top 0.254: v33.05,29.26 33.43,29.26 34.58,30.4 v35.21,30.4 | v35.59,29.13 36.1,29.13 36.48,28.75 ATMEGA.24 | v21.97,29.34 23.33,30.69 R_LED2.2
  Bottom 0.254: v35.21,30.4 35.21,29.51 v35.59,29.13 | v33.05,29.26 22.06,29.26 v21.97,29.34
LED_IND3  (via drill 0.2)
  Top 0.254: v33.94,21 34.83,20.12 36.48,20.12 ATMEGA.1 | v32.8,22.15 32.8,22.66 v31.53,23.93 | R_LED3.2 23.63,28.03 23.63,27.59 24.02,27.2 25.83,27.2 26.2,27.57 26.9,27.57 27.12,27.35 v27.97,27.35
  Bottom 0.254: v32.8,22.15 v33.94,21 | v31.53,23.93 28.1,27.35 v27.97,27.35
LS_EN  (via drill 0.2, 0.35)
  Top 0.254: TPS.ON 14.89,14.78 12.73,14.78 R14.2 12.61,14.91 11.84,14.91 9.94,16.81 7.65,16.81 5.24,19.23 v5.24,22.27 | v44.61,43.36 41.18,46.79 41.18,47.55 ATTINY.2 41.18,46.66 v38.9,44.37 | v10.52,41.7 13.16,41.7 13.41,41.96 14.98,41.96 15.48,41.45 16.03,41.45 16.41,41.84 16.41,43.18 v16.49,43.25 | Q1.1 45.86,34.33 47.48,34.33 47.5,34.31 47.66,34.31 v48.07,33.9
  Bottom 0.254: v5.24,22.27 4.86,22.66 4.86,40.59 7.12,42.85 9.38,42.85 v10.52,41.7 | v16.49,43.25 37.78,43.25 v38.9,44.37 | v48.07,33.9 44.64,37.34 44.64,39.52 44.64,43.33 v44.61,43.36
MISO  (via drill 0.2, 0.35)
  Top 0.254: v32.8,39.17 32.04,39.93 31.02,39.93 DECAWAVE.SPIMISO | v44.76,27.05 43.6,27.05 ATMEGA.16 | v45.63,10.46 v45.63,15.04 | v14.64,27.48 14.64,27.23 15.15,26.72 15.15,26.21 v13.37,24.43 | v9.89,21.54 9.66,21.31 9.66,20.37 11.4,18.63 11.41,18.64 11.44,18.64 v11.46,18.62 | ATMEGA_PROG.3 43.95,5.84 43.14,5.84 42.53,5.23 v42.5,5.23
  Bottom 0.254: v32.8,39.17 32.67,39.17 25.31,31.8 17.03,31.8 15.04,29.82 15.04,27.89 v14.64,27.48 | v44.76,27.05 45.42,27.05 45.75,26.72 45.75,15.16 v45.63,15.04 | v45.63,10.46 46.01,10.08 46.01,7.92 45.12,7.03 ATMEGA_PROG.3 | v9.89,21.54 9.89,22.3 12.02,24.43 v13.37,24.43 | v11.46,18.62 12.73,17.35 12.73,13.89 10.07,11.23 10.07,10.46 10.96,9.57 15.43,9.57 18.58,6.42 18.58,4.75 19.34,3.99 23.4,3.99 23.83,4.42 34.3,4.42 v36.15,2.56 38.03,4.44 39.73,4.44 40.51,5.23 v42.5,5.23
MOSI  (via drill 0.2)
  Top 0.254: DECAWAVE.SPIMOSI 31.02,38.53 31.28,38.28 32.8,38.28 33.1,37.97 34.43,37.97 35.21,38.76 35.21,40.44 35.72,40.94 36.23,40.94 36.74,40.44 v36.74,38.28 | 41.56,24.31 41.56,22.15 43.21,20.5 46.39,20.5 48.55,18.34 48.55,9.19 45.12,5.76 ATMEGA_PROG.4 | 41.56,24.31 41.56,25.07 42.83,26.34 43.47,26.34 ATMEGA.15 | v33.43,24.94 33.43,23.67 v33.82,23.29 | 41.56,24.31 v40.52,24.31
  Bottom 0.254: v36.74,38.28 36.69,38.23 36.69,36.47 34.58,34.36 34.58,26.08 v33.43,24.94 | v40.52,24.31 38.9,24.31 37.76,25.45 37.03,25.45 34.88,23.29 v33.82,23.29
N$2
  Top 0.254: C3.1 47.4,13.77 47.4,16.81 47.28,16.94 16MHZ.P$2 47.15,17.07 44.23,19.99 42.2,19.99 ATMEGA.8
N$3
  Top 0.254: C2.1 43.98,13.77 43.98,16.56 43.59,16.94 16MHZ.P$1 43.47,17.07 41.31,19.23 41.31,19.99 ATMEGA.7
N$4
  Top 0.254: R41.1 33.18,16.43 32.42,15.67 32.42,14.65 33.13,13.94 34.25,13.94 35.06,13.94 36.56,12.44 36.56,11.86 36.42,11.72 2N7002DW.2
N$5
  Top 0.254: R1.1 17.56,18.59 17.56,17.96 16.67,17.07 16.67,16.05 17.05,15.67 17.56,15.67 TPS.QOD
N$6
  Top 0.254: R4.1 18.07,3.48 16.54,3.48 16.04,3.99 Q2.1
N$7
  Top 0.254: LED1.A 8.8,40.56 9.69,39.67 9.69,36.09 11.51,34.26 14.21,34.26 17.69,30.78 R_LED1.1
N$8
  Top 0.254: LED2.A 10.57,40.56 11.34,39.8 11.34,38.38 18.04,31.67 21.24,31.67 22.13,30.78 R_LED2.1
N$9
  Top 0.381: R28.2 2.7,7.03 2.7,9.19 R25.1 2.83,9.32 6.13,9.32 7.15,10.34 I/N.1 7.02,10.46 7.02,11.23 8.92,13.13 LDO.1 9.05,13 9.56,13 11.97,10.59 14,10.59 S1.2
N$10  (via drill 0.2)
  Top 0.254: BQ24092.2 26.97,15.41 v27.24,15.14 | v28.22,14.1 29.1,14.98 29.25,14.83 R9.1
  Bottom 0.254: v28.22,14.1 28.18,14.1 27.24,15.05 v27.24,15.14
N$11
  Top 0.254: BQ24092.4 28.79,16.42 R13.2
N$12  (via drill 0.2)
  Top 0.254: v42.32,31.67 41.31,31.67 VD_R2.1 | v40.55,29.89 40.55,28.75 ATMEGA.19
  Top 0.381: v42.32,31.67 42.96,31.04 VD_R1.2
  Bottom 0.254: v42.32,31.67 v40.55,29.89
N$13
  Top 0.254: R36.2 3.23,44.78 2.29,43.83 RGB1.4
N$14  (via drill 0.2)
  Top 0.254: v7.15,23.04 7.15,21.63 R20.1 | v7.15,36.88 7.15,37.39 6.38,38.15 RGB1.1
  Bottom 0.254: v7.15,36.88 v7.15,23.04
N$15  (via drill 0.2, 0.35)
  Top 0.254: 4.64,38.42 1.56,35.33 1.56,26.47 2.83,25.2 2.83,21.13 R37.1 | 4.64,38.42 4.86,38.63 4.86,38.91 5.75,39.8 6.26,39.8 RGB1.2 | 4.64,38.42 4.91,38.15 4.91,37.47 7.53,34.84 7.53,32.54 7.91,32.16 8.46,32.16 9.8,33.5 v10.5,33.5 | v10.88,35.9 11.37,35.9 v12.3,34.97 | R_LED4.1 17.77,28.57 v12.86,33.48 | v13.3,39.89 13.98,40.58 LED4.A
  Bottom 0.254: v10.5,33.5 10.5,35.51 v10.88,35.9 | v13.3,39.89 12.3,38.9 v12.3,34.97 12.86,34.41 v12.86,33.48
N$16
  Top 0.254: R15.1 29.88,28.75 29.88,27.48 27.85,25.45 18.07,25.45 16.04,23.42 10.83,23.42 9.43,24.81 7.4,24.81 TPS1.QOD
N$17
  Top 0.254: LED3.A 13.04,41.2 13.37,41.2 13.55,41.38 14.84,41.38 15.91,40.31 15.91,34.59 18.07,32.43 23.78,32.43 24.16,32.05 24.16,30.15 23.27,29.26 22.89,29.26 22,28.37 R_LED3.1
N$18
  Top 0.254: U$2.A1 33.48,6.16 33.48,6.15 33.48,6.14 U$2.B12
N$19
  Top 0.254: U$2.A12 38.84,6.17 38.87,6.14 U$2.B1
N$23
  Top 0.254: R42.2 29.37,7.03 29.37,8.94 R43.1 29.39,10.51 29.95,11.07 2N7002DW.6
N$24
  Top 0.254: R43.2 28.1,9.07 27.9,9.27 27.9,11.17 28.46,11.73 29.35,11.73 29.36,11.72 2N7002DW.5
PB0
  Top 0.254: AT_PROG.4 47.02,46.66 45.37,46.66 41.71,50.32 38.23,50.32 37.75,49.83 37.75,49.03 36.95,48.23 36.95,46.68 37.88,45.76 37.88,42.77 38.57,42.08 ATTINY.5
PB1
  Top 0.254: AT_PROG.3 47.15,45.26 48.04,44.37 48.04,41.83 43.98,41.83 42.45,43.36 41.44,43.36 39.91,41.83 39.91,41.07 ATTINY.6
PB2  (via drill 0.2)
  Top 0.254: v42.07,42.72 41.18,41.83 41.18,41.07 ATTINY.7
  Bottom 0.254: v42.07,42.72 43.34,43.99 47.02,43.99 AT_PROG.2
PB5
  Top 0.254: AT_PROG.1 47.02,42.85 42.32,47.55 ATTINY.1
PG  (via drill 0.25)
  Top 0.254: BQ24092.5 25.95,16.95 25.95,17.13 25.65,17.43 25.5,17.28 22.65,17.28 22.42,17.5 19.11,17.5 v18.85,17.25 | RGB1.6 3.13,38.17 4.63,39.67 4.63,42.06 5.29,42.72 8.44,42.72 8.67,42.49 8.67,41.86 7.91,41.1 7.91,37.08 8.21,36.78 8.21,32.84 v8.19,32.82 | v13.09,19.58 13.05,19.54 11.3,19.54 10.52,20.32 10.52,21.97 9.69,22.81 9.43,22.81 v8.57,23.67
  Bottom 0.254: v18.85,17.25 18.22,17.88 14.44,17.88 13.03,19.29 13.03,19.51 v13.09,19.58 | v8.19,32.82 8.57,32.43 v8.57,23.67
PWR  (via drill 0.25, 0.35)
  Top 0.254: U$2.B9 34.5,6.65 34.92,7.07 34.92,7.75 U$2.A4 | U$2.B4 37.76,6.47 37.38,6.84 37.38,7.66 37.39,7.67 U$2.A9 37.39,8.63 37.47,8.71 v39.2,8.71
  Top 0.305: 7.4,2.34 6.38,2.34 5.88,2.84 C1.1 | 7.4,2.34 8.55,2.34 R5.2 | D1.1 26.89,5.12 25.54,6.48 v25.26,6.48 | v10.96,6.02 14.89,6.02 v18.45,9.57 | v7.4,2.46 7.4,2.34 | v38.13,32.94 36.74,32.94 R3.2
  Top 0.381: BQ24092.1 26,14.43 25.1,13.54 21.6,13.54 v21.24,13.89
  Bottom 0.254: 39.1,8.71 v39.2,8.71 39.43,8.71 39.73,8.42 41.14,8.42 41.31,8.58 | 30.69,8.74 31.43,8.74 33,7.16 33,6.55 33.41,6.14 U$2.B9 34.75,6.14 35.39,6.77 36.92,6.77 37.55,6.14 U$2.B4
  Bottom 0.305: 30.69,8.74 29.73,7.77 26.55,7.77 v25.26,6.48 25.26,9.52 18.5,9.52 v18.45,9.57 | v7.4,2.46 7.42,2.46 10.96,5.99 v10.96,6.02 | v38.13,32.94 41.44,32.94 42.3,33.81 44.99,33.81
  Bottom 0.381: v18.45,9.57 21.24,12.37 v21.24,13.89 | 41.31,8.58 44.4,11.67 45.16,11.67 48.14,14.65 48.14,30.66 44.99,33.81
RST  (via drill 0.2)
  Top 0.254: RST_SW.2 24.92,8.51 26.33,9.91 R6.2 27.76,12.67 31.81,12.67 v31.94,12.55 | v36.46,23.6 36.13,23.93 35.09,23.93 ATMEGA.29 | RST_SW.2 24.93,8.56 27.38,6.11 29.68,6.11 30.4,5.38 31.48,5.38 32.47,4.39 40.57,4.39 42.38,6.2 42.38,6.81 ATMEGA_PROG.1 | REED_SW.P$2 21.24,8.18 24.42,8.18 24.67,8.43 RST_SW.2 | 2N7002DW.3 34.76,12.8 v34.76,13.23
  Bottom 0.254: v36.46,23.6 36.53,23.6 38.23,21.89 38.23,15.72 36.28,13.77 35.29,13.77 v34.76,13.23 34.17,12.65 32.04,12.65 v31.94,12.55
RX  (via drill 0.2, 0.35)
  Top 0.254: v16.42,24.81 16.16,24.56 15.27,24.56 D2.1 | v27.69,19.96 27.69,22.22 25.18,24.74 v20.73,24.74 | v36.28,22.81 36.08,22.81 35.72,23.16 35.09,23.16 ATMEGA.30 | v32.36,20.2 32.36,17.57 31.96,17.17 v31.61,16.81 | U$2.B6 36.62,6.86 36.42,7.06 U$2.A7 36.42,8.78 v36.74,9.09
  Bottom 0.254: v20.73,24.74 16.49,24.74 v16.42,24.81 | v27.69,19.96 27.8,20.06 30.87,20.06 31.63,20.83 32.37,20.83 | v36.28,22.81 35.59,22.12 35.59,21.64 34.04,20.09 33.89,20.09 33.16,20.83 32.37,20.83 | 32.37,20.83 v32.37,20.2 v32.36,20.2 | v31.61,16.81 31.61,14.02 31.58,13.99 31.55,13.99 31.1,13.55 31.1,10.9 32.75,9.24 36.58,9.24 v36.74,9.09
SCK  (via drill 0.2)
  Top 0.254: v33.56,39.17 33.56,39.8 32.04,41.32 31.02,41.32 DECAWAVE.SPICLK | v30.69,35.03 31.12,34.59 38.77,34.59 40.01,33.35 40.01,31.57 42.07,29.51 42.07,28.75 ATMEGA.17 42.2,28.62 42.45,28.37 v44.86,28.37 | v46.26,14.53 46.26,9.45 45.12,8.3 ATMEGA_PROG.2
  Bottom 0.254: v33.56,39.17 33.56,38.02 30.63,35.09 v30.69,35.03 | v46.26,14.53 46.26,26.97 v44.86,28.37
SCL  (via drill 0.2, 0.35)
  Top 0.254: 30.07,24.37 33.56,27.86 35.85,27.86 37.02,26.69 37.02,25.35 36.48,24.81 35.09,24.81 ATMEGA.28 | 30.07,24.37 30.01,24.31 30.01,22.4 R11.1 | v29.12,24.43 30.01,24.43 30.07,24.37 | v27.47,26.08 17.05,26.08 13.88,29.26 4.73,29.26 v4.22,28.75 | IC2.1 24.36,21.36 25.18,22.17 v25.36,22.17 | R26.1 46.79,35.1 46.79,35.06 47.02,34.84 48.03,34.84 48.26,35.06 48.26,36.38 v47.91,36.73
  Bottom 0.254: v29.12,24.43 v27.47,26.08 27.47,24.28 v25.36,22.17 | v4.22,28.75 4.22,40.99 8.4,45.17 8.4,48.26 6.43,50.22 6.43,52.72 8.74,55.03 8.74,56 9.3,56.56 9.81,56.56 IC1.4 9.94,56.56 34.2,56.56 35.97,54.79 40.8,54.79 41.94,55.93 PH2.3 42.07,55.93 43.21,54.79 46.02,54.79 48.7,52.1 48.7,39.3 48.31,38.91 48.24,38.91 47.61,38.28 47.61,37.18 47.91,36.88 v47.91,36.73
SDA  (via drill 0.2, 0.35)
  Top 0.254: R12.1 18.48,22.25 20.99,22.25 v21.84,21.4 | v21.85,21.39 v21.84,21.4 | v32.67,25.2 33.05,25.58 34.96,25.58 ATMEGA.27 | v14,33.45 v16.8,30.66 | IC2.5 22.26,21.82 v21.84,21.4
  Top 0.381: v46.03,40.08 46.03,38.59 R24.1
  Bottom 0.254: v21.85,21.39 21.98,21.26 29.88,21.26 32.67,24.05 v32.67,25.2 32.67,27.35 32.93,27.61 32.93,28.37 32.67,28.62 18.83,28.62 v16.8,30.66 | 14,55.29 34.45,55.29 35.47,54.28 45.63,54.28 v47.02,52.88 | 14,55.29 9.94,55.29 IC1.6 | 14,55.29 v14,33.45
  Bottom 0.381: v47.02,52.88 47.02,50.54 48.1,49.46 48.1,39.51 48.07,39.48 47.5,39.48 46.9,40.08 v46.03,40.08
SS
  Top 0.254: ATMEGA.14 43.59,25.7 45.5,25.7 46.01,26.21 46.01,31.04 46.01,32.01 43.65,34.36 41.99,34.36 39.23,37.13 31.02,37.13 DECAWAVE.SPICSN
T_PWR  (via drill 0.25)
  Top 0.254: v34.5,9.8 34.56,9.8 35.4,8.97 35.4,7.85 U$2.A5 35.4,7.75 35.4,6.96 35.06,6.63 35.06,5.89 35.9,5.05 U$2.B5
  Top 0.305: v33.82,26.34 34.96,26.34 ATMEGA.26 35.09,26.34 35.85,26.34 36.1,26.08 36.1,25.96 v36.36,25.7 | v35.97,40.18 v35.97,37.9
  Bottom 0.254: v34.5,9.8 34.5,11.23 | 35.95,12.67 36.09,12.81
  Bottom 0.305: v33.82,26.34 33.74,26.41 33.74,34.36 35.97,36.6 v35.97,37.9 | v35.97,40.18 35.97,40.44 39.66,44.12 39.66,52.25 TOUCH.3 | 36.09,12.81 38.82,15.54 38.82,19.4 41.31,21.89 41.31,24.48 39.58,26.21 36.63,26.21 36.36,25.93 v36.36,25.7 | 34.5,11.23 35.95,12.67
TH  (via drill 0.2, 0.35)
  Top 0.254: v19.21,5.13 19.85,4.49 19.85,3.86 NTC.1 19.97,3.73 v21.62,2.08 | v19.82,15.14 20.09,15.41 BQ24092.9
  Bottom 0.254: v19.21,5.13 19.85,5.13 20.35,5.64 PAD6.1 20.37,6.72 16.47,10.62 16.47,11.71 19.82,15.06 v19.82,15.14 | v21.62,2.08 20.48,2.08 PAD3.1 20.48,1.95 20.48,0.94 3WAY_BAT.2
TOUCH  (via drill 0.35)
  Top 0.254: ATMEGA.12 43.73,24.13 44.65,24.13 46.52,26 46.52,32.22 43.86,34.87 42.2,34.87 40.49,36.59 v40.49,37.99 | PH2.2 38.1,54.54 v33.92,54.54 | v45.5,42.54 45.32,42.72 44.35,42.72 42.21,44.85 v40.7,44.85 | v45.35,40.71 43.75,39.11 v42.45,39.11
  Bottom 0.254: v33.92,54.54 34.77,53.69 44,53.69 45.93,51.76 45.93,50.08 v40.7,44.85 | v45.5,42.54 45.35,42.39 v45.35,40.71 | v40.49,37.99 41.62,39.11 v42.45,39.11
TX  (via drill 0.2, 0.35)
  Top 0.254: v15.65,19.73 15.27,20.12 D3.1 15.15,21.89 v14.26,22.78 | ATMEGA.31 35.09,22.27 35.9,22.27 36.51,21.66 v36.69,21.66 36.69,22.32 37.09,22.72 37.09,23.86 37.02,23.93 37.02,24.63 37.52,25.14 37.52,26.04 37.84,26.36 v37.84,27.24 | v11.44,49.86 11.62,50.04 11.62,50.62 11.97,50.98 35.21,50.98 36.48,52.25 37.12,52.25 TOUCH.2 | v37.09,9.85 36.38,9.85 35.81,9.29 U$2.A6 35.88,7.75 35.88,6.39 U$2.B7
  Bottom 0.254: v15.65,19.73 21.12,19.73 22.56,18.29 32.17,18.29 32.79,18.91 33.83,18.91 34.68,18.06 36.69,20.06 v36.69,21.66 | v14.26,22.78 14.26,24.56 11.59,27.23 11.59,45.52 12.71,46.63 12.71,48.59 v11.44,49.86 | v37.09,9.85 38.86,11.62 38.86,14.83 42.96,18.93 42.96,25.92 41.47,27.41 38.01,27.41 v37.84,27.24
VBAT+  (via drill 0.25, 0.35)
  Top 0.381: 9.56,3.73 10.47,3.73 C5.1 | 9.56,3.73 8.72,3.73 R5.1 | 14,1.83 13.37,1.83 12.53,0.99 9.71,0.99 9.51,1.19 9.51,3.61 9.56,3.61 9.56,3.73 | 14,1.83 15.02,1.83 Q2.3 | R20.2 7.93,20.59 7.93,19.2 v7.91,19.18 | v4.55,19.81 4.55,20.99 R37.2 | v42.45,32.94 43.42,32.94 VD_R1.1 | v14,1.57 14,1.83
  Top 0.406: v15.05,8.81 17.18,10.95 v17.18,11.25 | v20.23,14.03 21,14.81 21.63,14.81 BQ24092.10
  Bottom 0.254: 3WAY_BAT.1 17.94,0.94 17.94,1.95 PAD1.1
  Bottom 0.381: PAD4.1 14,3.61 14,4.24 8.55,9.69 7.72,9.69 4.55,12.85 v4.55,19.81 4.63,19.89 7.2,19.89 v7.91,19.18 7.98,19.1 10.88,19.1 12.25,20.47 20.18,20.47 20.38,20.67 30.18,20.67 v42.45,32.94 | PAD1.1 17.81,2.08 17.81,3.71 17.03,4.49 14,4.49 PAD4.1 | v14,1.57 14,3.35 PAD4.1
  Bottom 0.406: PAD1.1 17.89,5.94 15.04,8.79 v15.04,8.81 v15.05,8.81 | v20.23,14.03 19.96,14.03 v17.18,11.25
VCC  (via drill 0.25, 0.35)
  Top 0.254: Q1.2 41.32,38.16 40.85,38.63 40.85,38.72 41.79,39.66 41.79,40.37 ATTINY.8
  Top 0.381: TPS.VIN 14.89,16.69 14.26,16.69 12.86,18.08 12.86,18.21 12.48,18.59 R8.2 12.35,18.46 11.34,17.45 9.28,17.45 LDO.3 8.8,17.83 8.16,17.83 6.23,19.76 6.23,26.59 | v2.83,13.13 2.83,10.59 R25.2 | v3.21,25.83 4.73,25.83 TPS1.VIN 4.86,25.96 5.49,26.59 6.23,26.59 | 6.23,26.59 8.16,26.59 8.29,26.47 12.86,26.47 13.24,26.85 13.24,26.97 13.62,27.35 O/P.1 13.62,27.61 v13.62,28.5 | v2.7,30.28 2.7,33.58 BUZZ.+ | v30.13,32.56 29.76,32.56 R16.2 | ATTINY.8 43.2,40.96 v43.84,40.32
  Bottom 0.254: 48.93,29.72 48.93,29.69
  Bottom 0.381: v2.83,13.13 2.83,25.45 v3.21,25.83 2.7,26.34 v2.7,30.28 | 40.29,43.36 46.01,49.07 47.02,49.07 AT_PROG.6 | 40.29,43.36 35.81,38.87 | 48.93,29.72 48.93,31.93 43.84,37.02 v43.84,40.32 42.2,41.96 41.69,41.96 40.29,43.36 | 48.93,29.69 48.93,6.42 45.98,3.48 45.37,3.48 45.12,3.22 ATMEGA_PROG.6 | v13.62,28.5 14.36,29.23 14.36,29.95 24.34,39.93 34.76,39.93 35.81,38.87 | v30.13,32.56 31.02,32.56 35.25,36.8 35.25,38.2 35.81,38.75 35.81,38.87
VIB  (via drill 0.2)
  Top 0.254: v42.2,22.53 42.83,23.16 43.47,23.16 ATMEGA.11 | v37.45,17.91 38.97,17.91 39.1,17.78 v39.63,17.78 | v31.81,13.36 31.66,13.21 26.55,13.21 25.43,12.09 19.57,12.09 14.26,6.78 9.43,6.78 v7.02,9.19 | R21.2 4.5,45.57 4.33,45.39 4.33,44.35 v3.59,43.61 3.72,43.48 9.08,43.48 9.53,43.03 10.44,43.03 10.51,42.96 Q5.1 14.4,42.96 R18.2
  Bottom 0.254: v42.2,22.53 42.2,19.2 41.13,18.13 39.99,18.13 v39.63,17.78 | v37.45,17.91 37.45,17.75 33.05,13.36 v31.81,13.36 | v7.02,9.19 3.59,12.62 3.59,25.2 3.97,25.58 3.97,27.99 3.59,28.37 v3.59,43.61
VIB-
  Top 0.254: 4.61,47.17 5.47,46.3 5.8,46.3 6.02,46.08 6.02,45.06 5.8,44.84 5.76,44.84 R21.1 10.04,44.27 Q5.3
  Top 0.381: VIB.2 4.48,50.98 4.48,49.71 U$1.1 4.61,49.58 4.61,47.17
VLDO
  Top 0.381: R28.1 2.83,5.64 4.73,5.64 5.9,4.47 7.53,4.47 8.28,5.22 11.58,5.22 11.9,4.9 C4.2 12.38,3.61 13.62,3.61 14,3.99 Q2.2 14.13,4.11 20.48,10.46 S1.1
(copper drawn outside any net)
  shapes: Top area x2

## Text on the board
tNames: G | TCH | SCL | 3.3 | + | - | G | T_DA | T_PWR | V | G | 11 | 12 | 13 | 10 | Battery Level Indicator | . | BUZZ | . | 10 | 13 | 12 | 11 | G | V
bNames: SAFMET_V4.3 | G | TCH | SCL | 3.3 | . | A4 | A5 | G | G